# Altium PCB pcb.PcbDoc (part 2 of 2)
Units mm, origin at the board's own origin, x right, y up, seen from the top; angles counter-clockwise.
Board outline 134 x 85 mm, 2 copper layers (Top Layer, Bottom Layer), stack 1.575 mm thick; 121 components, 45 nets, 313 pads, 706 vias.
Unrouted connection lines stored in the file: 44.
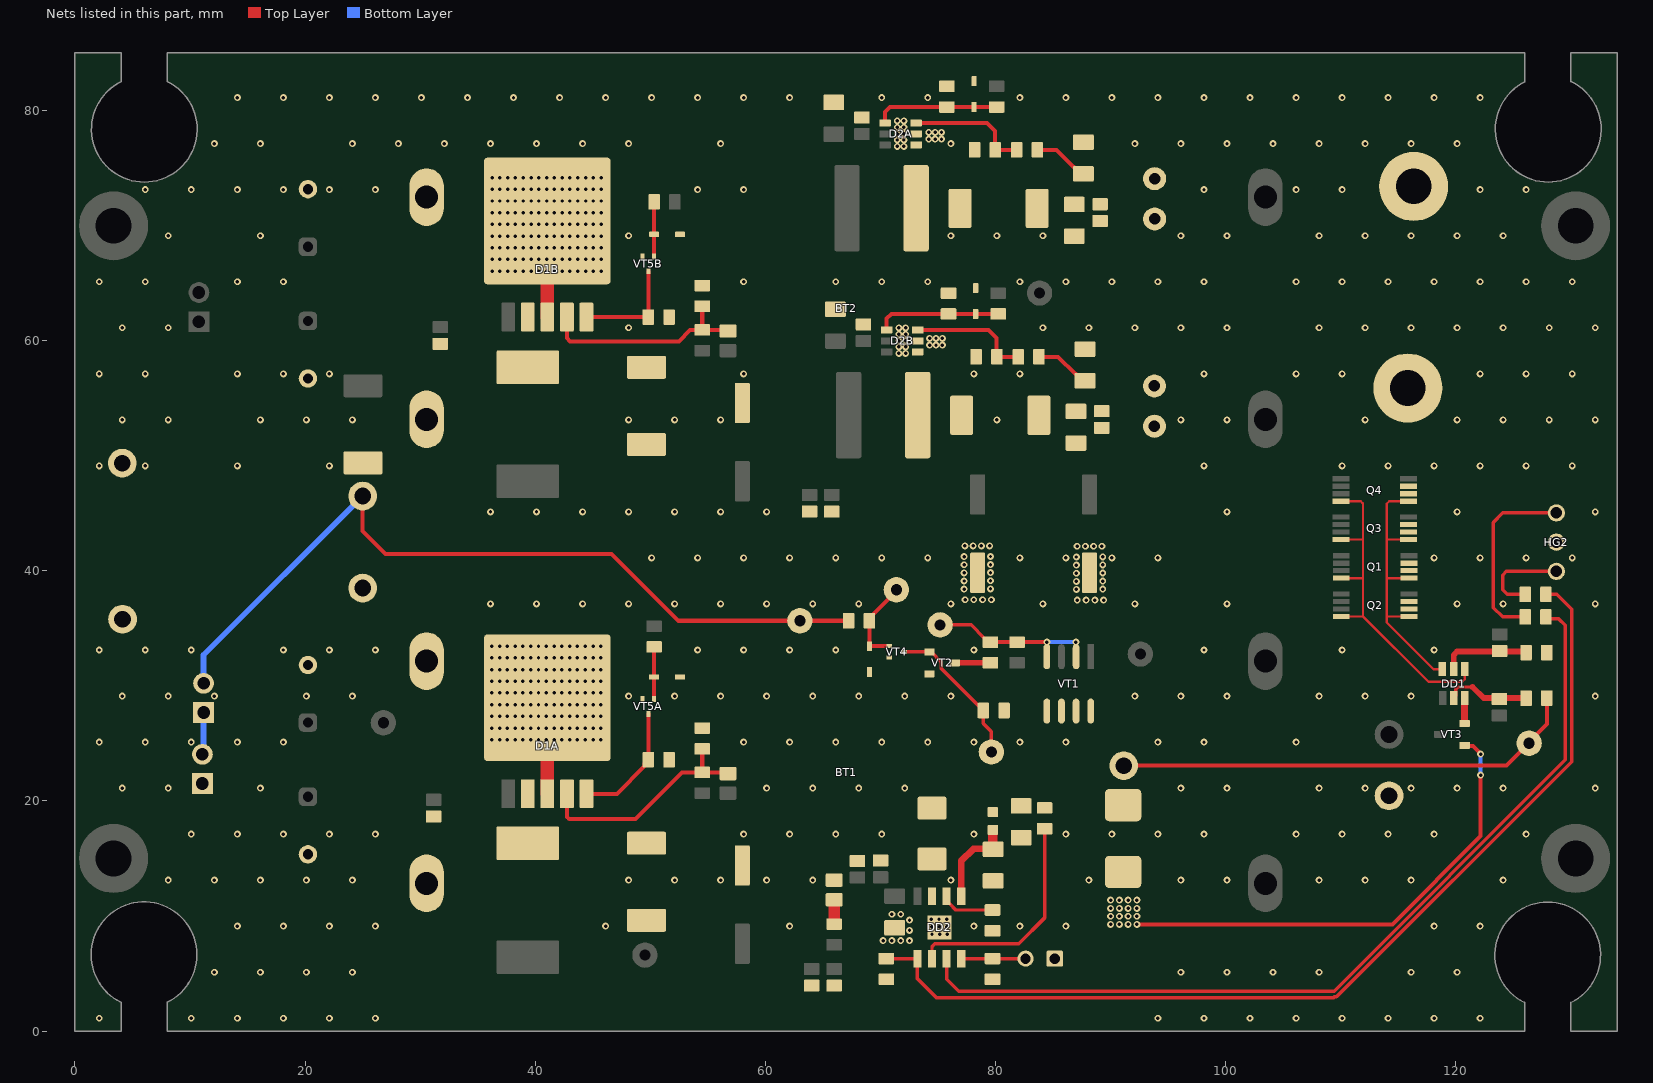
[diagram p2: the nets of this part, all layers, seen from the top]

## Via types
v1: diameter 0.6, hole 0.3, Top Layer to Bottom Layer, tented both sides, 706 vias

## Nets (pads, with @x,y where several pads share a name; then routed paths per layer and width w, separated by ;. In a path a pad name is that pad's centre, name@x,y a point inside that pad or via, vN(x,y) a via of type N, cw(c..) or ccw(c..) an arc to the next point about the centre after c; other vN are vias at no path point) (continued)
D1: DD2.1 R6.2 RVSET.2 | length 86.5
  Top Layer w0.2: DD2.1@73.198,6.31 DD2.1@73.203,6.305
  Top Layer w0.3: RVSET.2@70.51,6.31 DD2.1@73.198,6.31 ; DD2.1@73.203,6.305 73.203,4.572 74.854,2.921 109.372,2.921 109.424,2.973 109.623,2.973 130.048,23.397 130.048,36.678 128.778,37.948 R6.2@127.824,37.948
D2: DD2.3 R8.2 | length 78
  Top Layer w0.3: DD2.3@75.743,6.305 75.743,4.521 76.791,3.473 109.416,3.473 129.515,23.571 129.515,35.255 128.954,35.816 127.999,35.816 R8.2@127.824,35.992
GND: C1A.2 C1B.2 C2A.2 C2B.2 C3A.2 C3B.2 C4A.2 C4B.2 C5A.2 C5B.2 C8.2 C9.2 C10.2 C11.2 C12.2 C13.2 C14.2 C15A.2 C15B.2 C16A.2 C16B.2 C17A.2 C17B.2 C18.2 C20A.2 C20B.2 C21A.2 C21B.2 C22A.2 C22B.2 D1A.3 D1A.6 D1B.3 D1B.6 D2A.2 D2B.2 DD2.9 FP4.1 FP7.1 FP12.1 FP13.1 HG2.CC J1.1 pad.4@115.824,55.88 pad.4@116.332,73.406 Q1.6 Q1.7 Q2.6 Q2.7 Q3.6 Q3.7 Q4.6 Q4.7 R2A.2 R2B.2 R5A.2 R5B.2 R12.1 R16A.2 R16B.2 R17A.2 R17B.2 RICHG.1 RNTC.1 RVSET.1 VD1A.AN VD1B.AN VD3.AN VD5A.AN VD5B.AN VD6A.AN VD6B.AN VT2.2 VT4.2 VT5A.2 VT5B.2 X1.1 X2.2 X3.2 | length 11
  Top Layer w0.5: v1(40.958,25.324) D1A.6@41.021,25.26 ; v1(40.983,66.04) D1B.6@41.046,65.977
  Top Layer w1.2: D1A.3@41.046,20.624 D1A.6@41.046,27.521 ; D1B.3@41.046,62.051 D1B.6@41.046,65.977
  other v1: 2.107,1.12 10.107,1.12 14.107,1.12 18.107,1.12 22.107,1.12 26.107,1.12 94.107,1.12 98.107,1.12 102.107,1.12 106.107,1.12 110.107,1.12 114.107,1.12 118.107,1.12 122.107,1.12 12.107,5.12 16.107,5.12 20.107,5.12 24.107,5.12 96.107,5.12 100.107,5.12 104.107,5.12 108.107,5.12 116.107,5.12 120.107,5.12 70.231,7.874 70.993,7.874 71.755,7.874 72.517,7.874 74.473,8.433 75.133,8.433 75.794,8.433 72.517,8.763 74.447,9.068 75.108,9.068 75.768,9.068 14.107,9.12 18.107,9.12 22.107,9.12 26.107,9.12 46.107,9.12 62.107,9.12 78.107,9.12 82.107,9.12 86.107,9.12 118.107,9.12 122.107,9.12 72.517,9.652 74.422,9.728 75.082,9.728 75.743,9.728 70.993,10.16 71.755,10.16 8.107,13.12 12.107,13.12 16.107,13.12 20.107,13.12 24.107,13.12 48.107,13.12 52.107,13.12 56.107,13.12 60.107,13.12 64.107,13.12 76.107,13.12 88.107,13.12 96.107,13.12 100.107,13.12 108.107,13.12 112.107,13.12 116.107,13.12 124.107,13.12 10.107,17.12 14.107,17.12 18.107,17.12 22.107,17.12 26.107,17.12 58.107,17.12 62.107,17.12 66.107,17.12 70.107,17.12 78.107,17.12 86.107,17.12 90.107,17.12 94.107,17.12 98.107,17.12 106.107,17.12 110.107,17.12 114.107,17.12 118.107,17.12 126.107,17.12 4.107,21.12 8.107,21.12 16.107,21.12 60.107,21.12 64.107,21.12 68.107,21.12 72.107,21.12 96.107,21.12 100.107,21.12 108.107,21.12 112.107,21.12 116.107,21.12 120.107,21.12 124.107,21.12 132.107,21.12 2.107,25.12 6.107,25.12 10.107,25.12 14.107,25.12 18.107,25.12 58.107,25.12 62.107,25.12 66.107,25.12 70.107,25.12 74.107,25.12 78.107,25.12 82.107,25.12 86.107,25.12 94.107,25.12 98.107,25.12 106.107,25.12 36.22,25.324 36.897,25.324 37.574,25.324 38.251,25.324 38.927,25.324 39.604,25.324 40.281,25.324 41.634,25.324 42.311,25.324 42.988,25.324 43.664,25.324 44.341,25.324 45.018,25.324 45.695,25.324 36.22,26.34 36.897,26.34 37.574,26.34 38.251,26.34 38.927,26.34 39.604,26.34 40.281,26.34 40.958,26.34 41.634,26.34 42.311,26.34 42.988,26.34 43.664,26.34 44.341,26.34 45.018,26.34 45.695,26.34 36.22,27.356 36.897,27.356 37.574,27.356 38.251,27.356 38.927,27.356 39.604,27.356 40.281,27.356 40.958,27.356 41.634,27.356 42.311,27.356 42.988,27.356 43.664,27.356 44.341,27.356 45.018,27.356 45.695,27.356 36.22,28.372 36.897,28.372 37.574,28.372 38.251,28.372 38.927,28.372 39.604,28.372 40.281,28.372 40.958,28.372 41.634,28.372 42.311,28.372 42.988,28.372 43.664,28.372 44.341,28.372 45.018,28.372 45.695,28.372 4.107,29.12 8.107,29.12 12.107,29.12 20.107,29.12 24.107,29.12 48.107,29.12 52.107,29.12 56.107,29.12 60.107,29.12 64.107,29.12 68.107,29.12 72.107,29.12 76.107,29.12 92.107,29.12 96.107,29.12 100.107,29.12 108.107,29.12 112.107,29.12 116.107,29.12 132.107,29.12 36.22,29.388 36.897,29.388 37.574,29.388 38.251,29.388 38.927,29.388 39.604,29.388 40.281,29.388 40.958,29.388 41.634,29.388 42.311,29.388 42.988,29.388 43.664,29.388 44.341,29.388 45.018,29.388 45.695,29.388 36.22,30.404 36.897,30.404 37.574,30.404 38.251,30.404 38.927,30.404 39.604,30.404 40.281,30.404 40.958,30.404 41.634,30.404 42.311,30.404 42.988,30.404 43.664,30.404 44.341,30.404 45.018,30.404 45.695,30.404 36.22,31.42 36.897,31.42 37.574,31.42 38.251,31.42 38.927,31.42 39.604,31.42 40.281,31.42 40.958,31.42 41.634,31.42 42.311,31.42 42.988,31.42 43.664,31.42 44.341,31.42 45.018,31.42 45.695,31.42 36.22,32.436 36.897,32.436 37.574,32.436 38.251,32.436 38.927,32.436 39.604,32.436 40.281,32.436 40.958,32.436 41.634,32.436 42.311,32.436 42.988,32.436 43.664,32.436 44.341,32.436 45.018,32.436 45.695,32.436 2.107,33.12 6.107,33.12 10.107,33.12 18.107,33.12 22.107,33.12 26.107,33.12 54.107,33.12 58.107,33.12 62.107,33.12 66.107,33.12 78.107,33.12 98.107,33.12 110.107,33.12 118.107,33.12 36.22,33.452 36.897,33.452 37.574,33.452 38.251,33.452 38.927,33.452 39.604,33.452 40.281,33.452 40.958,33.452 41.634,33.452 42.311,33.452 42.988,33.452 43.664,33.452 44.341,33.452 45.018,33.452 45.695,33.452 36.107,37.12 40.107,37.12 44.107,37.12 48.107,37.12 52.107,37.12 56.107,37.12 60.107,37.12 64.107,37.12 68.107,37.12 76.107,37.12 84.107,37.12 92.107,37.12 100.107,37.12 120.107,37.12 124.107,37.12 132.107,37.12 87.097,37.461 87.859,37.461 88.621,37.461 89.383,37.461 77.343,37.49 78.105,37.49 78.867,37.49 79.629,37.49 87.02,38.382 77.267,38.411 89.312,38.405 79.559,38.434 87.02,39.087 89.312,39.108 77.267,39.116 79.559,39.137 87.02,39.792 77.267,39.821 89.312,39.81 79.559,39.839 87.02,40.497 77.267,40.526 89.312,40.513 79.559,40.542 50.107,41.12 54.107,41.12 58.107,41.12 62.107,41.12 66.107,41.12 70.107,41.12 74.107,41.12 82.107,41.12 86.107,41.12 90.107,41.12 94.107,41.12 118.107,41.12 122.107,41.12 126.107,41.12 130.107,41.12 87.02,41.202 89.312,41.216 77.267,41.231 79.559,41.245 87.09,42.139 87.803,42.139 88.517,42.139 89.23,42.139 77.336,42.168 78.05,42.168 78.763,42.168 79.477,42.168 36.107,45.12 40.107,45.12 44.107,45.12 48.107,45.12 52.107,45.12 56.107,45.12 60.107,45.12 100.107,45.12 120.107,45.12 132.107,45.12 2.107,49.12 6.107,49.12 14.107,49.12 22.107,49.12 98.107,49.12 110.107,49.12 114.107,49.12 118.107,49.12 122.107,49.12 126.107,49.12 130.107,49.12 4.107,53.12 8.107,53.12 16.107,53.12 20.107,53.12 24.107,53.12 48.107,53.12 52.107,53.12 56.107,53.12 80.107,53.12 96.107,53.12 100.107,53.12 112.107,53.12 120.107,53.12 124.107,53.12 128.107,53.12 132.107,53.12 2.107,57.12 6.107,57.12 14.107,57.12 18.107,57.12 22.107,57.12 58.107,57.12 78.107,57.12 82.107,57.12 98.107,57.12 106.107,57.12 110.107,57.12 122.107,57.12 126.107,57.12 130.107,57.12 71.59,58.903 72.175,58.903 71.59,59.455 72.175,59.455 74.27,59.614 74.822,59.614 75.374,59.614 71.59,60.008 72.175,60.008 74.27,60.198 74.822,60.198 75.374,60.198 71.59,60.56 72.175,60.56 4.107,61.12 8.107,61.12 48.107,61.12 71.59,61.112 72.175,61.112 84.107,61.12 88.107,61.12 92.107,61.12 96.107,61.12 100.107,61.12 108.107,61.12 112.107,61.12 116.107,61.12 120.107,61.12 124.107,61.12 128.107,61.12 132.107,61.12 2.107,65.12 6.107,65.12 14.107,65.12 18.107,65.12 58.107,65.12 66.107,65.12 70.107,65.12 74.107,65.12 82.107,65.12 86.107,65.12 90.107,65.12 94.107,65.12 98.107,65.12 106.107,65.12 110.107,65.12 114.107,65.12 118.107,65.12 122.107,65.12 126.107,65.12 130.107,65.12 36.246,66.04 36.923,66.04 37.599,66.04 38.276,66.04 38.953,66.04 39.629,66.04 40.306,66.04 41.66,66.04 42.336,66.04 43.013,66.04 43.69,66.04 44.367,66.04 45.043,66.04 45.72,66.04 36.246,67.056 36.923,67.056 37.599,67.056 38.276,67.056 38.953,67.056 39.629,67.056 40.306,67.056 40.983,67.056 41.66,67.056 42.336,67.056 43.013,67.056 43.69,67.056 44.367,67.056 45.043,67.056 45.72,67.056 36.246,68.072 36.923,68.072 37.599,68.072 38.276,68.072 38.953,68.072 39.629,68.072 40.306,68.072 40.983,68.072 41.66,68.072 42.336,68.072 43.013,68.072 43.69,68.072 44.367,68.072 45.043,68.072 45.72,68.072 36.246,69.088 36.923,69.088 37.599,69.088 38.276,69.088 38.953,69.088 39.629,69.088 40.306,69.088 40.983,69.088 41.66,69.088 42.336,69.088 43.013,69.088 43.69,69.088 44.367,69.088 45.043,69.088 45.72,69.088 8.107,69.12 16.107,69.12 48.107,69.12 76.107,69.12 80.107,69.12 84.107,69.12 96.107,69.12 100.107,69.12 108.107,69.12 112.107,69.12 116.107,69.12 120.107,69.12 124.107,69.12 36.246,70.104 36.923,70.104 37.599,70.104 38.276,70.104 38.953,70.104 39.629,70.104 40.306,70.104 40.983,70.104 41.66,70.104 42.336,70.104 43.013,70.104 43.69,70.104 44.367,70.104 45.043,70.104 45.72,70.104 36.246,71.12 36.923,71.12 37.599,71.12 38.276,71.12 38.953,71.12 39.629,71.12 40.306,71.12 40.983,71.12 41.66,71.12 42.336,71.12 43.013,71.12 43.69,71.12 44.367,71.12 45.043,71.12 45.72,71.12 36.246,72.136 36.923,72.136 37.599,72.136 38.276,72.136 38.953,72.136 39.629,72.136 40.306,72.136 40.983,72.136 41.66,72.136 42.336,72.136 43.013,72.136 43.69,72.136 44.367,72.136 45.043,72.136 45.72,72.136 6.107,73.12 10.107,73.12 14.107,73.12 18.107,73.12 22.107,73.12 26.107,73.12 54.107,73.12 58.107,73.12 98.107,73.12 106.107,73.12 110.107,73.12 122.107,73.12 126.107,73.12 36.246,73.152 36.923,73.152 37.599,73.152 38.276,73.152 38.953,73.152 39.629,73.152 40.306,73.152 40.983,73.152 41.66,73.152 42.336,73.152 43.013,73.152 43.69,73.152 44.367,73.152 45.043,73.152 45.72,73.152 36.246,74.168 36.923,74.168 37.599,74.168 38.276,74.168 38.953,74.168 39.629,74.168 40.306,74.168 40.983,74.168 41.66,74.168 42.336,74.168 43.013,74.168 43.69,74.168 44.367,74.168 45.043,74.168 45.72,74.168 71.45,76.886 72.034,76.886 12.107,77.12 16.107,77.12 24.107,77.12 28.107,77.12 32.107,77.12 36.107,77.12 40.107,77.12 44.107,77.12 48.107,77.12 56.107,77.12 76.107,77.12 92.107,77.12 96.107,77.12 100.107,77.12 104.107,77.12 108.107,77.12 112.107,77.12 116.107,77.12 120.107,77.12 71.45,77.438 72.034,77.438 74.193,77.521 74.746,77.521 75.298,77.521 71.45,77.991 72.034,77.991 74.193,78.105 74.746,78.105 75.298,78.105 71.45,78.543 72.034,78.543 71.45,79.096 72.034,79.096 14.107,81.12 18.107,81.12 22.107,81.12 26.107,81.12 30.107,81.12 34.107,81.12 38.107,81.12 42.107,81.12 46.107,81.12 50.107,81.12 54.107,81.12 58.107,81.12 62.107,81.12 70.107,81.12 74.107,81.12 82.107,81.12 86.107,81.12 90.107,81.12 94.107,81.12 98.107,81.12 102.107,81.12 106.107,81.12 110.107,81.12 114.107,81.12 118.107,81.12 122.107,81.12
ICHG: DD2.6 RICHG.2 | length 4.7
  Top Layer w0.3: DD2.6@75.743,11.729 75.743,11.317 75.943,11.117 75.955,11.117 76.545,10.527 RICHG.2@79.731,10.527
MODEM_PWR: C3B.1 C4B.1 C5B.1 R1B.1 VD4B.CA X2.1 | length 4.9
  Top Layer w0.35: R1B.1@83.768,58.598 85.433,58.598 86.945,57.086 86.971,57.086 87.545,56.512 C3B.1@87.77,56.512
NetBT1_1+: BT1.1+ BT1.2+ BT2.1+ BT2.2+ FU1.1 VT3.1 | length 41.9
  Top Layer w0.35: v1(92.278,9.271) 114.472,9.271 122.149,16.948 v1(122.149,22.25) ; VT3.1@120.759,24.831 120.798,24.792 121.487,24.792 122.149,24.13 v1(122.149,24.079)
  Bottom Layer w0.35: v1(122.149,22.25) v1(122.149,24.079)
  other v1: 89.992,9.271 90.754,9.271 91.516,9.271 89.992,9.982 90.754,9.982 91.516,9.982 92.278,9.982 89.992,10.668 90.754,10.668 91.516,10.668 92.278,10.668 89.992,11.379 90.754,11.379 91.516,11.379 92.278,11.379
NetC6_2: C6.2 DD1.2@119.807,31.456 R12.2 | length 7.6
  Top Layer w0.5: DD1.2@119.807,31.456 119.807,32.694 120.099,32.987 123.876,32.987 125.956,32.987 R12.2@126.044,32.899
NetC7_1: C7.1 DD1.5@119.807,28.956 R11.1 | length 7.4
  Top Layer w0.3: DD1.5@119.807,28.956 119.982,29.131 119.982,29.731 120.157,29.906 121.452,29.906 ; R11.1@126.083,28.948 R11.1@126.095,28.936
  Top Layer w0.5: 121.452,29.906 122.41,28.948 123.749,28.948 R11.1@126.083,28.948
NetC12_1: C12.1 R7.2 | length 2.1
  Top Layer w1: R7.2@65.964,9.307 C12.1@65.964,11.418
NetC13_1: C13.1 DD2.5 R9.2 | length 7.8
  Top Layer w0.6: DD2.5@77.013,11.729 77.013,14.783 78.077,15.847 79.547,15.847 C13.1@79.756,16.056
  Top Layer w0.8: C13.1@79.756,16.056 R9.2@79.756,17.487
NetC14_1: C14.1 FP10.1 FU1.2 L2.2 R9.1 R11.2 R13.2 R14.1 TP5.1 VT1.5@84.455,27.809 VT1.6@85.725,27.809 VT1.7@86.995,27.809 VT1.8@88.265,27.809 | length 40.5
  Top Layer w0.35: FP10.1@91.135,23.063 124.409,23.063 TP5.1@126.365,25.019 ; TP5.1@126.289,25.095 127.895,26.701 R11.2@127.895,28.936
NetC19A_1: C19A.1 D1A.4 R4A.2 R5A.1 | length 19.9
  Top Layer w0.35: D1A.4@42.746,20.624 42.746,18.62 42.951,18.415 48.692,18.415 52.752,22.476 R4A.2@54.508,22.476 ; R5A.1@54.508,24.536 R4A.2@54.508,22.476 ; C19A.1@56.744,22.376 56.644,22.476 R4A.2@54.508,22.476
NetC19B_1: C19B.1 D1B.4 R4B.2 R5B.1 | length 18.5
  Top Layer w0.35: D1B.4@42.746,62.051 42.746,60.225 43.028,59.944 52.476,59.944 53.464,60.931 R4B.2@54.508,60.931 ; R5B.1@54.508,62.992 R4B.2@54.508,60.931 ; C19B.1@56.744,60.831 56.644,60.931 R4B.2@54.508,60.931
NetD1A_2: D1A.2 L4A.1 VD1A.CA
NetD1A_5: D1A.5 R17A.1 VT5A.3 | length 10.7
  Top Layer w0.35: D1A.5@44.446,20.624 47.091,20.624 49.499,23.032 49.499,23.271 R17A.1@49.824,23.596 VT5A.3@49.824,27.569
NetD1B_2: D1B.2 L4B.1 VD1B.CA
NetD1B_5: D1B.5 R17B.1 VT5B.3 | length 9.4
  Top Layer w0.35: D1B.5@44.446,62.051 R17B.1@49.824,62.051 VT5B.3@49.824,66.025
NetD2A_1: D2A.1 L1A.2 VD4A.AN
NetD2A_3: D2A.3 R1A.2 R2A.1 | length 10.6
  Top Layer w0.35: D2A.3@73.091,78.913 79.253,78.913 79.934,78.232 79.934,76.617 R2A.1@79.97,76.581 R1A.2@81.828,76.581
NetD2A_4: D2A.4 R16A.1 R19A.2 VD6A.CA | length 10.8
  Top Layer w0.35: D2A.4@70.391,78.913 70.391,79.89 70.804,80.304 R16A.1@75.768,80.304 VD6A.CA@78.13,80.304 R19A.2@80.086,80.304
NetD2B_1: D2B.1 L1B.2 VD4B.AN
NetD2B_3: D2B.3 R1B.2 R2B.1 | length 10.6
  Top Layer w0.35: D2B.3@73.231,60.93 79.393,60.93 80.074,60.249 80.074,58.634 R2B.1@80.11,58.598 R1B.2@81.968,58.598
NetD2B_4: D2B.4 R16B.1 R19B.2 VD6B.CA | length 10.8
  Top Layer w0.35: D2B.4@70.531,60.93 70.531,61.907 70.944,62.321 R16B.1@75.908,62.321 VD6B.CA@78.271,62.321 R19B.2@80.226,62.321
NetDD1_1: DD1.1@120.757,31.456 Q1.4 Q2.4 Q3.4 Q4.4 | length 29.7
  Top Layer w0.2: Q3.4@110.011,42.719 111.933,42.719 ; Q4.4@110.011,46.046 111.739,46.046 111.933,45.853 111.933,42.719 ; Q2.4@110.036,36.039 111.933,36.039 ; Q1.4@110.036,39.366 111.922,39.366 111.933,39.355 ; DD1.1@120.757,31.456 120.757,30.572 120.543,30.359 117.612,30.359 111.933,36.039 ; 111.933,36.039 111.933,39.355 ; 111.933,39.355 111.933,42.719
NetDD1_3: DD1.3@118.831,31.456 Q1.5 Q2.5 Q3.5 Q4.5 | length 24.5
  Top Layer w0.2: 114.101,39.366 Q1.5@115.912,39.366 ; Q3.5@115.887,42.719 113.99,42.719 ; Q4.5@115.887,46.046 114.209,46.046 113.99,45.827 113.99,42.719 ; Q2.5@115.912,36.039 114.006,36.039 113.99,36.023 ; DD1.3@118.831,31.456 118.049,31.456 113.99,35.515 113.99,36.023 ; 113.99,36.023 113.99,42.719
NetDD1_6: DD1.6@120.757,28.956 VT3.2 | length 2.2
  Top Layer w0.2: VT3.2@120.757,26.734 VT3.2@120.759,26.731 ; DD1.6@120.757,28.956 DD1.6@120.767,28.946
  Top Layer w0.6: VT3.2@120.757,26.734 DD1.6@120.757,28.956
NetDD2_7: DD2.7 L2.1
NetHG2_A1: HG2.A1 R6.1 | length 8.2
  Top Layer w0.3: R6.1@126.024,37.948 124.46,37.948 124.054,38.354 124.054,39.624 124.384,39.954 HG2.A1@128.727,39.954
NetHG2_A2: HG2.A2 R8.1 | length 16.3
  Top Layer w0.3: R8.1@126.024,35.992 124.054,35.992 123.241,36.805 123.241,44.196 124.079,45.034 HG2.A2@128.727,45.034
NetR3_2: R3.2 R10.1 TP6.1 VT1.2@86.995,32.541 VT1.4@84.455,32.541 | length 14.9
  Top Layer w0.3: TP6.1@75.184,35.306 77.874,35.306 79.028,34.152 79.378,33.802 R10.1@79.553,33.802 ; v1(86.984,33.802) 86.989,33.796 86.989,32.547 VT1.2@86.995,32.541
  Top Layer w0.35: R10.1@79.553,33.802 R3.2@81.864,33.802 v1(84.455,33.802) VT1.4@84.455,32.541
  Bottom Layer w0.35: v1(84.455,33.802) v1(86.984,33.802)
NetR10_2: R10.2 VT2.3 | length 3.1
  Top Layer w0.5: VT2.3@76.454,32.002 R10.2@79.553,32.002
NetR14_2: R14.2 TP7.1 VT2.1 VT4.3 | length 13.2
  Top Layer w0.3: VT4.3@72.049,32.952 VT2.1@74.254,32.952 74.404,32.952 75.286,32.07 75.286,31.51 R14.2@78.932,27.864 78.932,26.732 79.629,26.035 TP7.1@79.629,24.257
NetR15_2: R15.2 TP9.1 VD3.CA VT4.1 | length 8.1
  Top Layer w0.35: VT4.1@70.749,33.452 VD3.CA@69.037,33.452 R15.2@69.037,35.662 69.362,35.987 69.362,36.215 71.147,38 71.147,38.508 TP9.1@71.501,38.862
NetR18A_2: R18A.2 VD5A.CA VT5A.1 | length 4.7
  Top Layer w0.35: VT5A.1@50.324,28.869 VD5A.CA@50.324,30.785 R18A.2@50.324,33.604
NetR18B_2: R18B.2 VD5B.CA VT5B.1 | length 4.7
  Top Layer w0.35: VT5B.1@50.324,67.325 R18B.2@50.324,72.06
NetVD2_AN: FP11.1 R15.1 TP8.1 VD2.AN X4.2 | length 70.5
  Top Layer w0.35: FP11.1@25,46.5 25,43.443 26.974,41.469 46.618,41.469 52.426,35.662 R15.1@67.237,35.662
  Bottom Layer w0.5: X4.2@11.176,30.226 11.176,32.676 FP11.1@25,46.5
NetX1_2: X1.2 X4.1 | length 3.7
  Bottom Layer w0.2: X1.2@11.074,24.054 X1.2@11.176,24.155
  Bottom Layer w0.5: X1.2@11.176,24.155 X4.1@11.176,27.686
NTC: DD2.4 J1.2 RNTC.2 | length 5.6
  Top Layer w0.2: DD2.4@77.013,6.305 DD2.4@77.019,6.299
  Top Layer w0.3: DD2.4@77.019,6.299 J1.2@82.601,6.299
ROUTER_PWR: C3A.1 C4A.1 C5A.1 R1A.1 VD4A.CA X3.1 | length 4.9
  Top Layer w0.35: R1A.1@83.628,76.581 85.293,76.581 86.805,75.069 86.831,75.069 87.405,74.495 C3A.1@87.63,74.495
  Top Layer w1: X3.1@93.801,70.56 X3.1@93.819,70.578
TEST: DD2.2 R13.1 | length 19.6
  Top Layer w0.3: DD2.2@74.473,6.305 74.473,7.341 74.714,7.582 82.004,7.582 84.252,9.83 R13.1@84.252,17.591
pads on no net: D2A.6 D2B.6 DD1.1@120.757,31.456 DD1.2@119.807,31.456 DD1.3@118.831,31.456 DD1.4 DD1.5@119.807,28.956 DD1.6@120.757,28.956 Q1.1 Q1.8 Q2.1 Q2.8 Q3.1 Q3.8 Q4.1 Q4.8 VT1.1@88.265,32.541 VT1.2@86.995,32.541 VT1.3@85.725,32.541 VT1.4@84.455,32.541 VT1.5@84.455,27.809 VT1.6@85.725,27.809 VT1.7@86.995,27.809 VT1.8@88.265,27.809

## Polygon pours and split planes (outlines as drawn)
GND on Top Layer "NONET_L-01_P-001" (solid, pour order 121): 0,85 0,0 134,0 134,85
BGND on Top Layer "NONET_L-01_P-001" (solid, pour order 120): 101.93,55.855 104.978,55.855 108.534,52.299 108.534,33.63 104.496,29.591 101.956,29.591
NetBT1_1+ on Top Layer "NONET_L-01_P-001" (solid, pour order 118): 88.646,14.224 89.408,14.986 92.71,14.986 93.472,14.224 93.472,8.636 88.646,8.636
NetC14_1 on Top Layer "NONET_L-01_P-001" (solid, pour order 117): 73.152,20.828 73.152,18.39 92.761,18.39 92.761,26.289 89.611,29.439 80.213,29.439 80.213,27.381 ccw(c81.305,27.381) 81.305,26.289 87.579,26.289 88.367,25.502 88.367,21.895 87.3,20.828
NetVD2_AN on Top Layer "NONET_L-01_P-001" (solid, pour order 116): 26.746,50.419 23.19,50.419 23.19,46.609 ccw(c24.714,46.609) 24.714,45.085 25.476,45.085 ccw(c25.476,46.355) 26.746,46.355
12V_EXT on Top Layer "NONET_L-01_P-001" (solid, pour order 115): 23.241,54.991 26.797,54.991 26.797,61.062 23.241,61.062
5V_EXT on Top Layer "Top Layer-5V_EXT" (solid, pour order 114): 66.55,45.972 67.693,44.829 93.017,44.829 94.694,43.152 94.694,37.514 92.382,35.202 86.007,35.202 85.016,34.212 85.016,30.886 94.442,30.886 98.402,34.847 98.402,45.845 95.506,48.74 68.963,48.74 68.328,49.375 68.328,49.706 68.342,49.706 68.342,59.434 68.316,59.459 64.061,59.459 64.061,67.689 68.201,67.689 68.201,78.636 63.756,78.636 59.565,78.636 59.565,49.985 57.025,49.985 57.025,49.274 36.578,49.274 36.578,45.972
5V_EXT on Top Layer "NONET_L-01_P-001" (solid, pour order 113): 63.652,60.655 67.272,60.655 67.45,60.477 69.533,60.477 69.736,60.274 71.032,60.274 71.032,59.665 69.736,59.665 69.508,59.436 67.45,59.436 67.272,59.258 63.652,59.258
NetD2B_1 on Top Layer "NONET_L-01_P-001" (solid, pour order 112): 72.733,59.334 73.749,59.334 73.749,57.81 74.343,57.217 74.336,55.788 74.905,55.22 76.34,55.22 78.067,55.22 78.067,51.841 77.991,51.765 74.791,51.765 74.308,51.283 74.308,49.733 72.124,49.733 72.124,57.201 72.733,57.81
NetD2A_1 on Top Layer "NONET_L-01_P-001" (solid, pour order 111): 72.593,77.318 73.609,77.318 73.609,75.794 74.203,75.2 74.196,73.771 74.764,73.203 76.2,73.203 77.927,73.203 77.927,69.825 77.851,69.748 74.651,69.748 74.168,69.266 74.168,67.716 71.984,67.716 71.984,75.184 72.593,75.794
5V_EXT on Top Layer "NONET_L-01_P-001" (solid, pour order 110): 63.754,78.638 67.132,78.638 67.31,78.461 69.393,78.461 69.596,78.257 70.891,78.257 70.891,77.648 69.596,77.648 69.367,77.419 67.31,77.419 67.132,77.241 63.754,77.241
MODEM_PWR on Top Layer "NONET_L-01_P-001" (solid, pour order 109): 82.716,55.167 82.716,51.841 82.741,51.816 84.722,51.816 86.043,53.137 90.209,53.137 91.961,51.384 94.501,51.384 95.263,52.146 95.263,53.035 94.527,53.772 93.307,53.772 90.386,56.693 84.192,56.693
ROUTER_PWR on Top Layer "NONET_L-01_P-001" (solid, pour order 108): 82.575,73.15 82.575,69.825 82.601,69.799 84.582,69.799 85.903,71.12 90.068,71.12 91.821,69.367 94.361,69.367 95.123,70.129 95.123,71.018 94.386,71.755 93.167,71.755 90.246,74.676 84.052,74.676
5V_CHARGER on Top Layer "Top Layer-5V_CHARGER" (solid, pour order 104): 36.576,4.75 66.777,4.75 66.777,4.801 67.818,4.801 69.596,6.579 69.596,10.033 70.485,10.922 73.558,10.922 73.558,12.522 72.187,13.894 67.183,13.894 67.183,8.89 66.726,8.433 57.023,8.433 57.023,8.052 36.576,8.052
NetD1A_2 on Top Layer "NONET_L-01_P-001" (solid, pour order 107): 38.684,22.047 38.684,18.872 37.617,17.805 36.449,17.805 36.449,15.291 51.384,15.291 51.384,17.348 41.504,17.348 39.98,18.872 39.98,22.047
NetD1B_2 on Top Layer "NONET_L-01_P-001" (solid, pour order 106): 38.684,63.373 38.684,60.198 37.617,59.131 36.627,59.131 36.627,56.667 51.384,56.667 51.384,58.699 41.478,58.699 39.98,60.198 39.98,63.373
GND on Bottom Layer "NONET_L-01_P-001" (solid, pour order 119): -0.05,85.011 -0.05,0.011 133.95,0.011 133.95,85.011
NetBT1_1+ on Bottom Layer "Bottom Layer-NetBT1_1+" (solid, pour order 103): 28.423,75.184 28.423,0 31.496,0 31.496,-0.025 89.205,-0.025 93.472,4.242 93.472,11.938 88.646,11.938 88.646,7.366 86.385,5.105 34.747,5.105 34.747,75.184 34.061,75.87 29.108,75.87
NetC14_1 on Bottom Layer "NONET_L-01_P-001" (solid, pour order 105): 28.273,37.668 33.172,37.668 33.172,-31.166 35.662,-33.655 82.956,-33.655 86.436,-33.655 86.436,-28.397 86.436,-16.485 90.83,-16.485 90.83,-38.176 89.484,-38.176 87.351,-38.176 27.788,-38.176 27.788,-27.203
no net on Bottom Solder "NONET_L-01_P-001" (solid, pour order 77): 71.12,12.7 79.248,12.7 79.248,5.08 71.12,5.08

## Other copper
Top Layer:
  region net 12V_EXT: 19.38,28.009 19.38,19.394 28.215,19.394 37.084,19.394 38.223,19.394 38.223,21.92 34.664,21.92 28.575,28.009 26.67,28.009
  pour cut-out: 72.581,16.256 76.263,16.256 76.263,18.034 72.581,18.034
  region net NetDD2_7: 74.117,10.973 74.117,13.081 73.228,13.97 73.228,15.977 75.743,15.977 75.743,13.995 74.828,13.081 74.828,10.973
  region net 12V_EXT: 19.456,69.36 19.456,60.745 28.215,60.745 37.084,60.745 38.223,60.745 38.223,63.271 34.664,63.271 28.575,69.36 26.67,69.36
  pour cut-out: 0,47.5 23,47.5 23,37.5 0,37.5
Bottom Layer:
  pour cut-out: 72.581,16.256 76.263,16.256 76.263,18.034 72.581,18.034
Multi-Layer:
  pour cut-out: 69.571,57.048 69.571,50.191 70.841,50.191 70.841,57.048
  pour cut-out: 69.291,74.905 69.291,68.301 70.815,68.301 70.815,74.905
  pour cut-out: 34.938,8.992 43.752,8.992 43.752,14.228 34.938,14.228
  pour cut-out: 34.938,50.165 43.752,50.165 43.752,55.401 34.938,55.401

## Silkscreen, mask and mechanical layers (free items; w line width, h text height)
Top Overlay:
  lines w0.254: 89.662,2.286 101.6,2.286 ; 89.662,4.318 101.6,4.318 ; 89.662,6.35 101.6,6.35 ; 89.662,8.382 101.6,8.382 ; 94.996,0.508 94.996,8.382 ; 105.664,2.286 117.602,2.286 ; 105.664,4.318 117.602,4.318 ; 105.664,6.35 117.602,6.35 ; 105.664,8.382 117.602,8.382 ; 110.998,0.508 110.998,8.382 ; 120.625,59.258 132.563,59.258 ; 120.625,61.29 132.563,61.29 ; 120.625,63.322 132.563,63.322 ; 120.65,57.15 132.588,57.15 ; 122.555,41.91 125.095,41.91 ; 122.555,43.18 125.095,43.18 ; 125.959,55.245 125.959,63.322 ; 89.662,0.508 89.662,10.414 89.662,10.668 101.346,10.668 101.6,10.653 101.6,0.508 100.33,0.508 89.662,0.508 ; 105.664,0.508 116.332,0.508 117.602,0.508 117.602,10.653 117.348,10.668 105.664,10.668 105.664,10.414 105.664,0.508 ; 120.625,55.245 132.563,55.245 132.563,65.593 132.309,65.608 120.625,65.608 120.625,65.354 120.625,55.245 ; 122.555,40.005 125.095,40.005 123.825,41.91 122.555,40.005 ; 122.555,45.085 125.095,45.085 123.825,43.18 122.555,45.085
  text "Uout1" at 90.624,76.705 h1
  text "ON/OFF Button" at 13.916,71.428 h1 r270
  text "OPEN-OFF" at 3.248,66.094 h1 r270
  text "CLOSE-ON" at 5.28,66.094 h1 r270
  text "R2" at 125.143,63.903 h1
  text "Val" at 121.333,61.744 h1
  text "Vout" at 126.667,61.744 h1
  text "3.6k" at 121.333,59.712 h1
  text "12V" at 126.667,59.712 h1
  text "Uout2" at 90.776,58.899 h1
  text "4.7k" at 121.333,57.68 h1
  text "9V" at 126.667,57.68 h1
  text "9.1k" at 121.333,55.648 h1
  text "5V" at 126.667,55.648 h1
  text "G" at 123.215,45.722 h1
  text "R" at 123.263,37.919 h1
  text "FAN(12V)" at 6.296,35.106 h1 r270
  text "Thermostat" at 6.296,26.216 h1 r270
  text "RVSET" at 92.91,9.09 h1
  text "RICHG" at 108.912,9.09 h1
  text "NC" at 90.37,6.804 h1
  text "4.2V" at 95.704,6.804 h1
  text "NC" at 106.372,6.804 h1
  text "2.1A" at 111.706,6.804 h1
  text "43k" at 90.37,4.772 h1
  text "4.3V" at 95.704,4.772 h1
  text "45k" at 106.372,4.772 h1
  text "3A" at 111.706,4.772 h1
  text "75k" at 90.37,2.74 h1
  text "4.35V" at 95.704,2.74 h1
  text "91k" at 106.372,2.74 h1
  text "1.5A" at 111.706,2.74 h1
  text "51k" at 78.178,0.962 h1
  text "100k" at 90.37,0.962 h1
  text "4.4V" at 95.704,0.962 h1
  text "135k" at 106.372,0.962 h1
  text "1A" at 111.706,0.962 h1
Top Solder:
  text "-" at 100.407,73.05 h3 r90
  text "+" at 100.347,69.596 h3 r90
  text "-" at 100.483,55.245 h3 r90
  text "+" at 100.55,51.613 h3 r90
  text "+" at 29.035,45.974 h2 r90
  text "12V_IN" at 27.838,43.005 h2
  text "-" at 28.245,39.481 h2 r180
  text "BGND" at 109.55,27.737 h2
  text "4V2" at 93.421,24.206 h2
  text "GND" at 111.15,16.51 h2
  text "+" at 27.283,11.989 h2 r90
  text "@vitech_ua" at 11.227,7.277 h2
  text "WiFi-UPSv4.1" at 11.227,3.988 h2
  text "11/2025 Kyiv" at 11.227,1.2 h2
Bottom Solder:
  text "BAT+" at 23.292,80.772 h3
  text "BAT-" at 120.244,80.772 h3
  text "BAT+" at 23.292,1.778 h3
  text "BAT-" at 120.244,1.778 h3
Board:
  lines w0.254: 8,82.499 8,85 125,85 126,85 126,82.499 ccw(c128.025,78.375) 130.049,82.499 ; 8.049,82.499 cw(c6.025,78.375) 4,82.499 4,85 0,85 0,84 0,1 0,0 ; 125.951,2.489 cw(c127.975,6.613) 130,2.489 130,0 134,0 134,82 134,85 130,85 130,82.499 ; 126,2.5 126,0 8,0 8,2.5 ccw(c6,6.636) 4,2.5 4,0 0,0 ; 0,0 0,0
Title:
  lines w0.1: 158.635,166.34 226.585,166.34
  lines w0.127: -85.044,-23.058 -79.964,-23.058 ; -85.044,47.427 -79.964,47.427 ; -85.044,117.912 -79.964,117.912 ; -35.768,-93.543 -35.768,-88.463 ; -35.768,183.317 -35.768,188.397 ; 13.381,-93.543 13.381,-88.463 ; 13.381,183.317 13.381,188.397 ; 62.53,-93.543 62.53,-88.463 ; 111.806,-93.543 111.806,-88.463 ; 154.56,-88.435 154.56,-58.435 303.56,-58.435 ; 154.56,-83.435 303.56,-83.435 ; 154.56,-78.435 303.56,-78.435 ; 154.56,-68.435 303.56,-68.435 ; 160.955,-93.543 160.955,-88.463 ; 160.955,183.317 160.955,188.397 ; 169.56,-78.435 169.56,-68.435 ; 210.104,-93.543 210.104,-88.463 ; 210.104,183.317 210.104,188.397 ; 239.56,-88.435 239.56,-78.435 ; 259.38,-93.543 259.38,-88.463 ; 259.38,183.317 259.38,188.397 ; 288.56,-78.435 288.56,-68.435 ; 303.576,-23.058 308.656,-23.058 ; 303.576,47.427 308.656,47.427 ; 303.576,117.912 308.656,117.912 ; -85.044,-93.543 308.656,-93.543 308.656,188.397 -85.044,188.397 -85.044,-93.543 ; -79.964,-88.463 303.576,-88.463 303.576,183.317 -79.964,183.317 -79.964,-88.463
  text "1" at -61.007,184.968 h1.78
  text "2" at -11.968,184.968 h1.78
  text "3" at 37.291,184.968 h1.78
  text "5" at 135.86,184.968 h1.78
  text "6" at 184.882,184.968 h1.78
  text "7" at 234.412,184.968 h1.78
  text "8" at 283.434,184.968 h1.78
  text "NOTES: UNLESS OTHERWISE SPECIFIED." at 160.035,167.39 h2.5
  text "1. MATERIAL:BASE MATERIAL LAMINATED EPOXY GLASS (ANY COLOR)" at 160.185,161.34 h2.5
  text "GRADE NEMA FR-4. ALL SIDES 1 OZ COPPER PER MIL-P-13949." at 166.785,156.84 h2.5
  text "AND IS UL APPROVED MFR SOURCE WITH 1.6 mm +-10 PERCENT" at 166.785,153.14 h2.5
  text "A" at -83.139,150.983 h1.78
  text "A" at 305.481,150.983 h1.78
  text "2. SOLDER PLATE PER QQ-S-571." at 160.185,148.84 h2.5
  text "3. SILKSCREEN IS ABSENT." at 160.185,144.84 h2.5
  text "4. DIMENSIONS IN MILLIMETERS, (...) - FOR REFERENCE," at 160.135,139.94 h2.5
  text "TOLERANCE ARE: +-0.15; HOLES: +- 0.05." at 167.285,135.89 h2.5
  text "5. LIQUID PHOTO IMAGABLE SOLDERMASK ENTHRONE DSR3241" at 160.185,131.84 h2.5
  text "OR ALTERNATIVE." at 167.285,127.89 h2.5
  text "6.  FOR REF ONLY: THIS BOARD HAS SMD ON BOTH SIDES." at 160.185,123.84 h2.5
  text "7.  THE FINISH OF THE BOARD IS HASL." at 160.035,117.44 h2.5
  text "8. PCB stackup:" at 160.035,111.74 h2.5
  text "B" at -83.139,80.371 h1.78
  text "B" at 305.481,80.371 h1.78
  text "C" at -83.139,9.759 h1.78
  text "C" at 305.481,9.759 h1.78
  text "D" at -83.139,-60.345 h1.78
  text "D" at 305.481,-60.345 h1.78
  text "TITLE:" at 155.535,-60.86 h1.2
  text "SIZE:" at 155.535,-70.61 h1.2
  text "DWG NO:" at 170.535,-70.61 h1.2
  text "REV:" at 290.035,-70.61 h1.2
  text ".Project_Version" at 295.235,-71.76 h2.5
  text "A3" at 161.535,-75.36 h2.5
  text "DATE:" at 155.535,-80.61 h1.2
  text "PCB DESIGNER:" at 241.035,-80.61 h1.2
  text ".PRINT_DATE" at 169.035,-81.86 h2.5
  text "FILE NAME:" at 155.535,-85.61 h1.2
  text "SHEET:" at 240.785,-85.61 h1.2
  text ".PCB_FILE_NAME_NO_PATH" at 169.035,-86.86 h2.5
  text "1 OF 1" at 258.785,-87.11 h2.5
  text "1" at -61.007,-91.892 h1.78
  text "2" at -11.968,-91.892 h1.78
  text "3" at 37.291,-91.892 h1.78
  text "4" at 86.584,-91.892 h1.78
  text "5" at 135.86,-91.892 h1.78
  text "6" at 184.882,-91.892 h1.78
  text "7" at 234.412,-91.892 h1.78
  text "8" at 283.434,-91.892 h1.78

## Dimensions
3.355,15.009 to 0,0 on Dimensions
3.355,69.984 to 0,85 on Dimensions
130.406,69.984 to 125,85 on Dimensions
128.727,42.494 to 134,0 on Dimensions
128.727,42.494 to 134,85 on Dimensions
3.355,69.984 to 3.355,15.009 on Dimensions
3.355,15.009 to 130.406,15.009 on Dimensions
3.355,69.984 to 130.406,69.984 on Dimensions
0,85 to 134,85 on Dimensions
0,85 to 0,0 on Dimensions

## Text inside footprints (layer, text, board x,y; h text height)
C16A: Bottom Assembly "+" at 18.344,26.515 h0.9 r270
C16B: Bottom Assembly "+" at 18.344,67.866 h0.9 r270
C20A: Bottom Assembly "+" at 22.144,20.663 h0.9 r90
C20B: Bottom Assembly "+" at 22.144,62.015 h0.9 r90
D1A: Top Assembly "1" at 36.057,23.839 h1.59
D1B: Top Assembly "1" at 36.057,65.267 h1.59
HG2: Top Assembly "G" at 130.102,43.469 h0.5 r90; Top Assembly "R" at 130.152,41.144 h0.5 r90
X2: Top Assembly "2" at 97.102,55.807 h1 r90; Top Assembly "1" at 97.102,52.307 h1 r90
X3: Top Assembly "2" at 97.12,73.821 h1 r90; Top Assembly "1" at 97.12,70.321 h1 r90